# EAGLE board PCB_V3 (EAGLE 7.7.0)
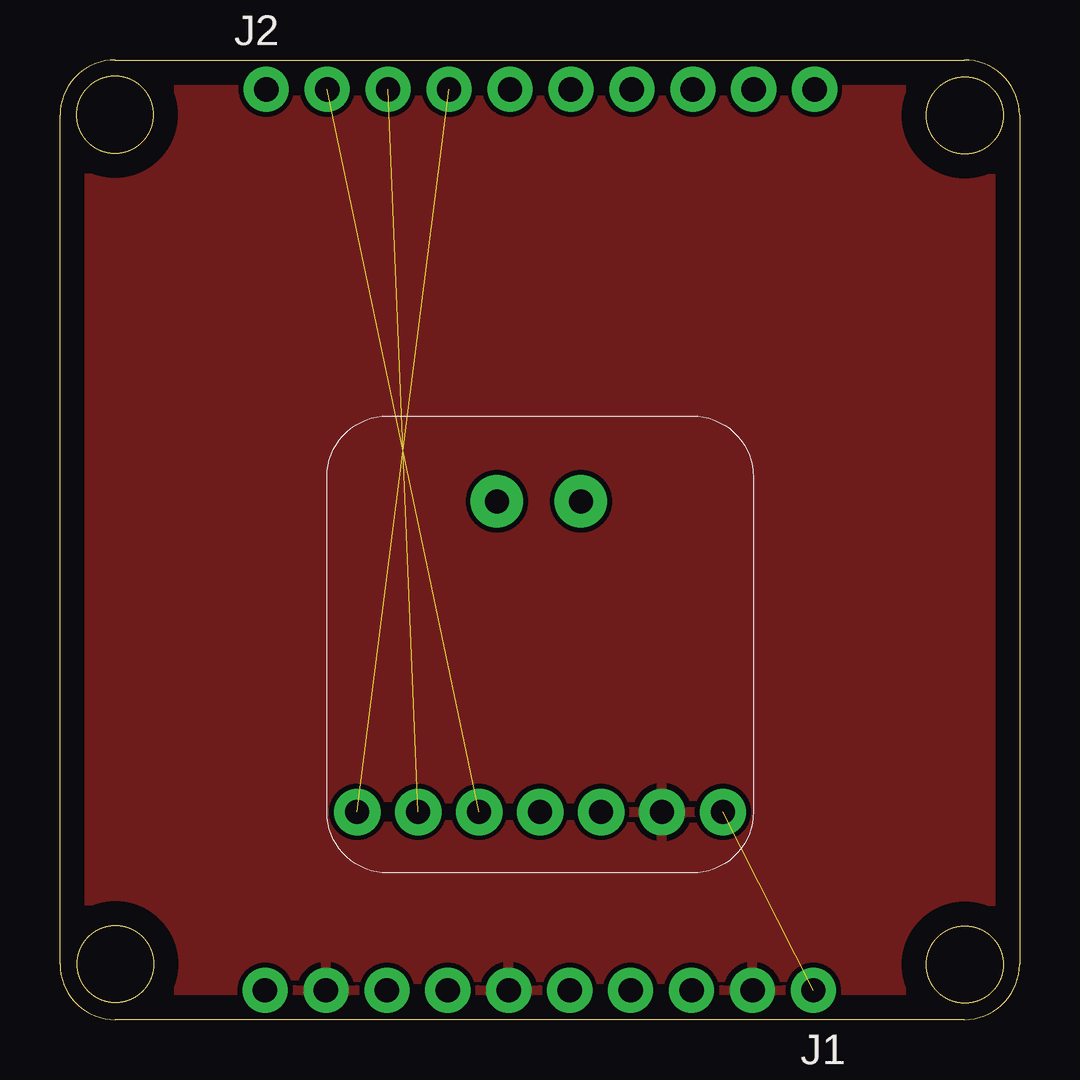
[diagram p0: board, top side]
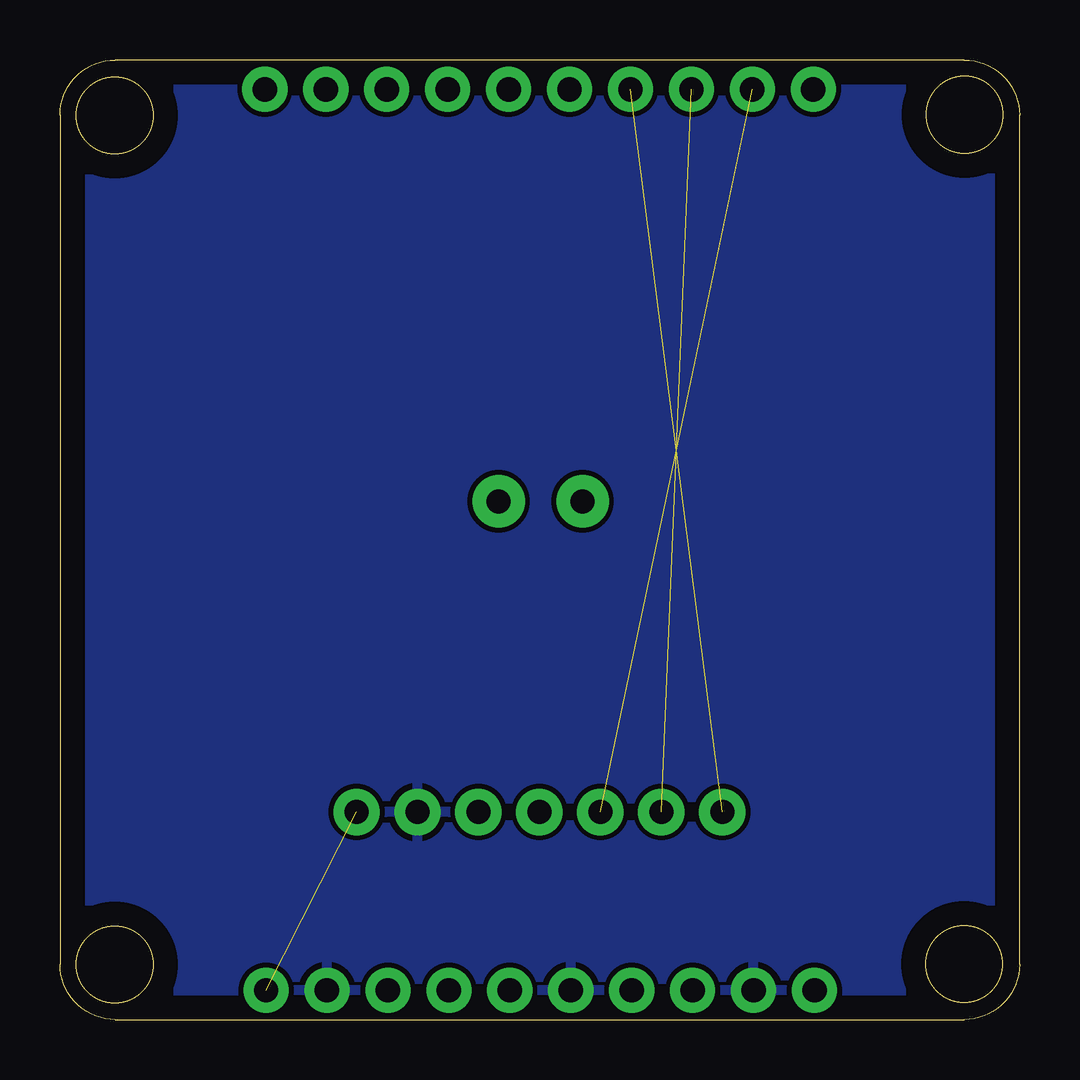
[diagram p1: board, bottom side, seen from below]

Size 40 x 40 mm. Coordinates in mm from the lower left corner, seen from the top.
Outline: 0,2.3 0,37.7 arc-90 2.3,40 37.7,40 arc-90 40,37.7 40,2.3 arc-90 37.7,0 2.3,0 arc-90 0,2.3
Outline: circle at 37.72,2.29 radius 1.6
Outline: circle at 2.31,2.31 radius 1.6
Outline: circle at 37.72,37.69 radius 1.6
Outline: circle at 2.29,37.72 radius 1.6
Copper layers (1*16): Top 0.035mm / dielectric 1.5mm / Bottom 0.035mm
Design rules "default": minimum track width 10mil, minimum drill 24mil, track to track 8mil, track to pad 8mil, pad to pad 8mil, via to via 8mil, smd to smd 8mil, copper to edge 40mil, drill to drill 8mil, minimum pad ring 10mil, minimum via ring 8mil, stop-mask expansion 4mil, vias tented up to drill 0mil, thermal gap 10mil

## Footprints (pad centres in the part's own frame; a part is rotated, then mirrored left to right if it is on the bottom)
1X10_NO_SILK = drill 1.016 pad 1.88: 1 0,0; 2 2.54,0; 3 5.08,0; 4 7.62,0; 5 10.16,0; 6 12.7,0; 7 15.24,0; 8 17.78,0; 9 20.32,0; 10 22.86,0
I2S_BREAKOUT = drill 1 pad 1.93: 1 -7.62,-6.35; 2 -5.08,-6.35; 3 -2.54,-6.35; 4 0,-6.35; 5 2.54,-6.35; 6 5.08,-6.35; 7 7.62,-6.35 | drill 1 pad 2.184: 8 -1.8,6.604; 9 1.7,6.604

## Placement (x,y rotation side)
J1  [1X10_NO_SILK]  31.41,1.22 180 top
J2  [1X10_NO_SILK]  8.6,38.77 0 top
U$1  I2S_BREAKOUT  [I2S_BREAKOUT]  20.02,15 0 top

## Library data of the parts
J1 J2 = SparkFun-Connectors; PROD_ID: CONN-11563
U$1 = whisper_PCB

## Nets
5V: J1.1 U$1.7
BCK: J2.3 U$1.2
D+: J2.8
D-: J2.7
DOUT: J2.2 U$1.3
GND: J1.2 J1.6 J1.9 U$1.6
GPIO6: J1.3
LRCK: J2.4 U$1.1
N$1: U$1.8
N$2: U$1.9

## Tracks (layer width: path | path; a pad name or v marks a point on that pad's centre or on a via)
5V  (1 unrouted)
BCK  (1 unrouted)
DOUT  (1 unrouted)
GND
  pour Bottom: -4.98,45 -4.98,-5 45.02,-5 45.02,45
  pour Top: -4.98,45 -4.98,-5 45.02,-5 45.02,45
LRCK  (1 unrouted)